# Allegro board Smartlocker10x8.brd
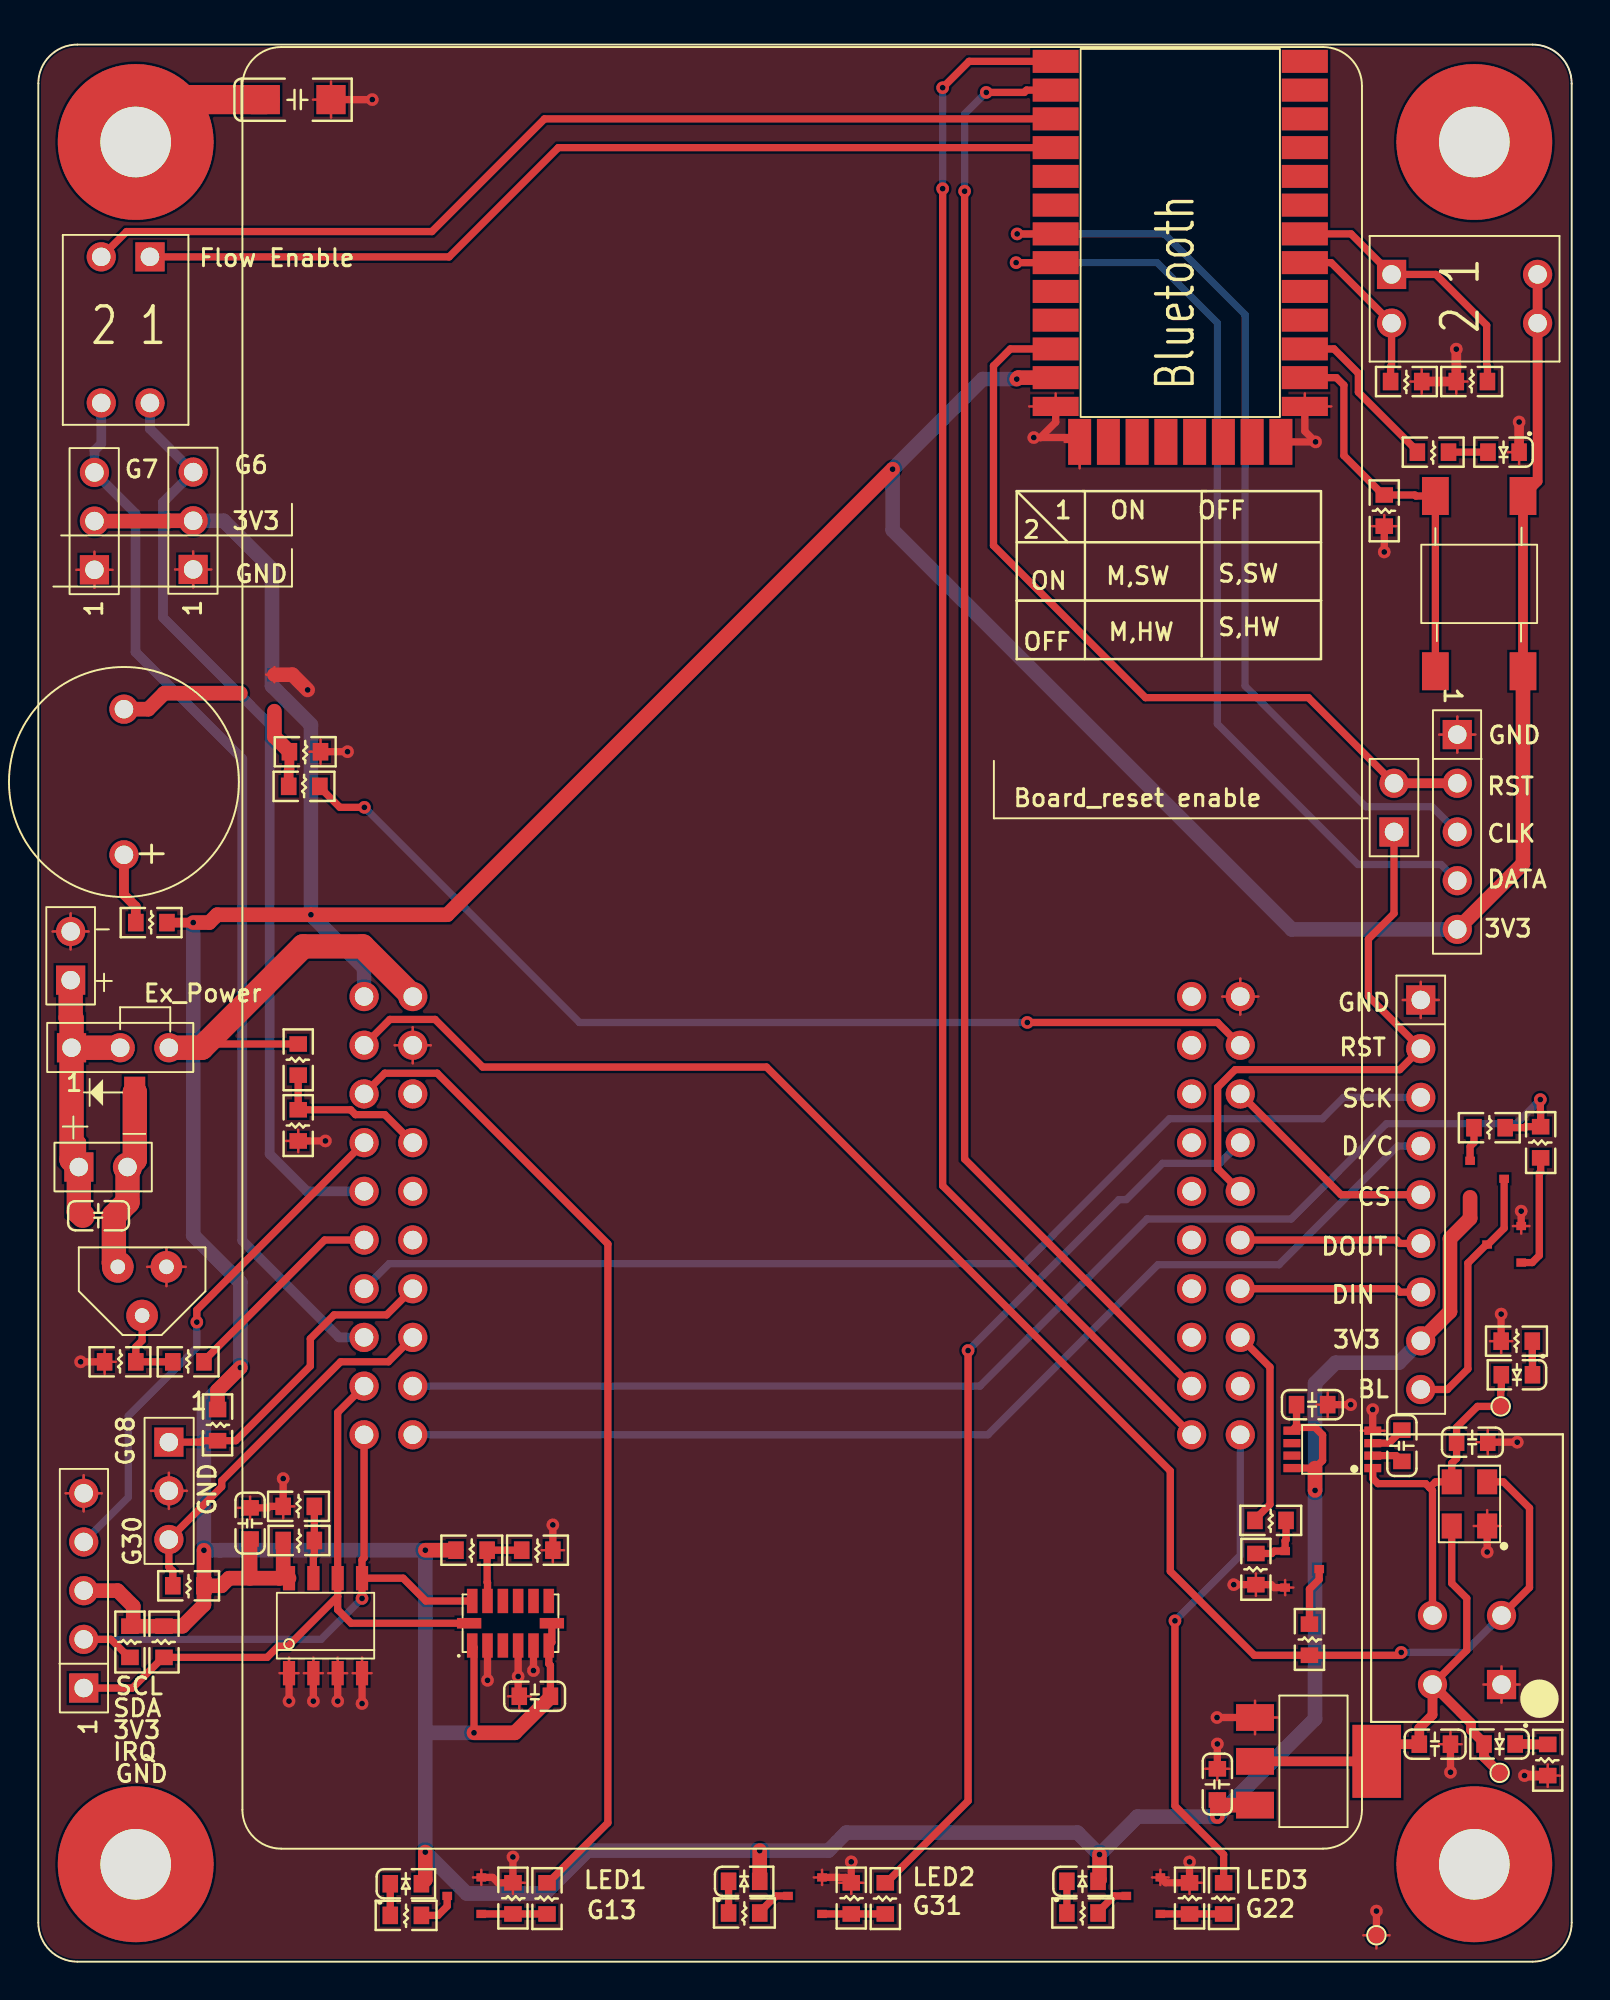
[diagram p0: board, top side]
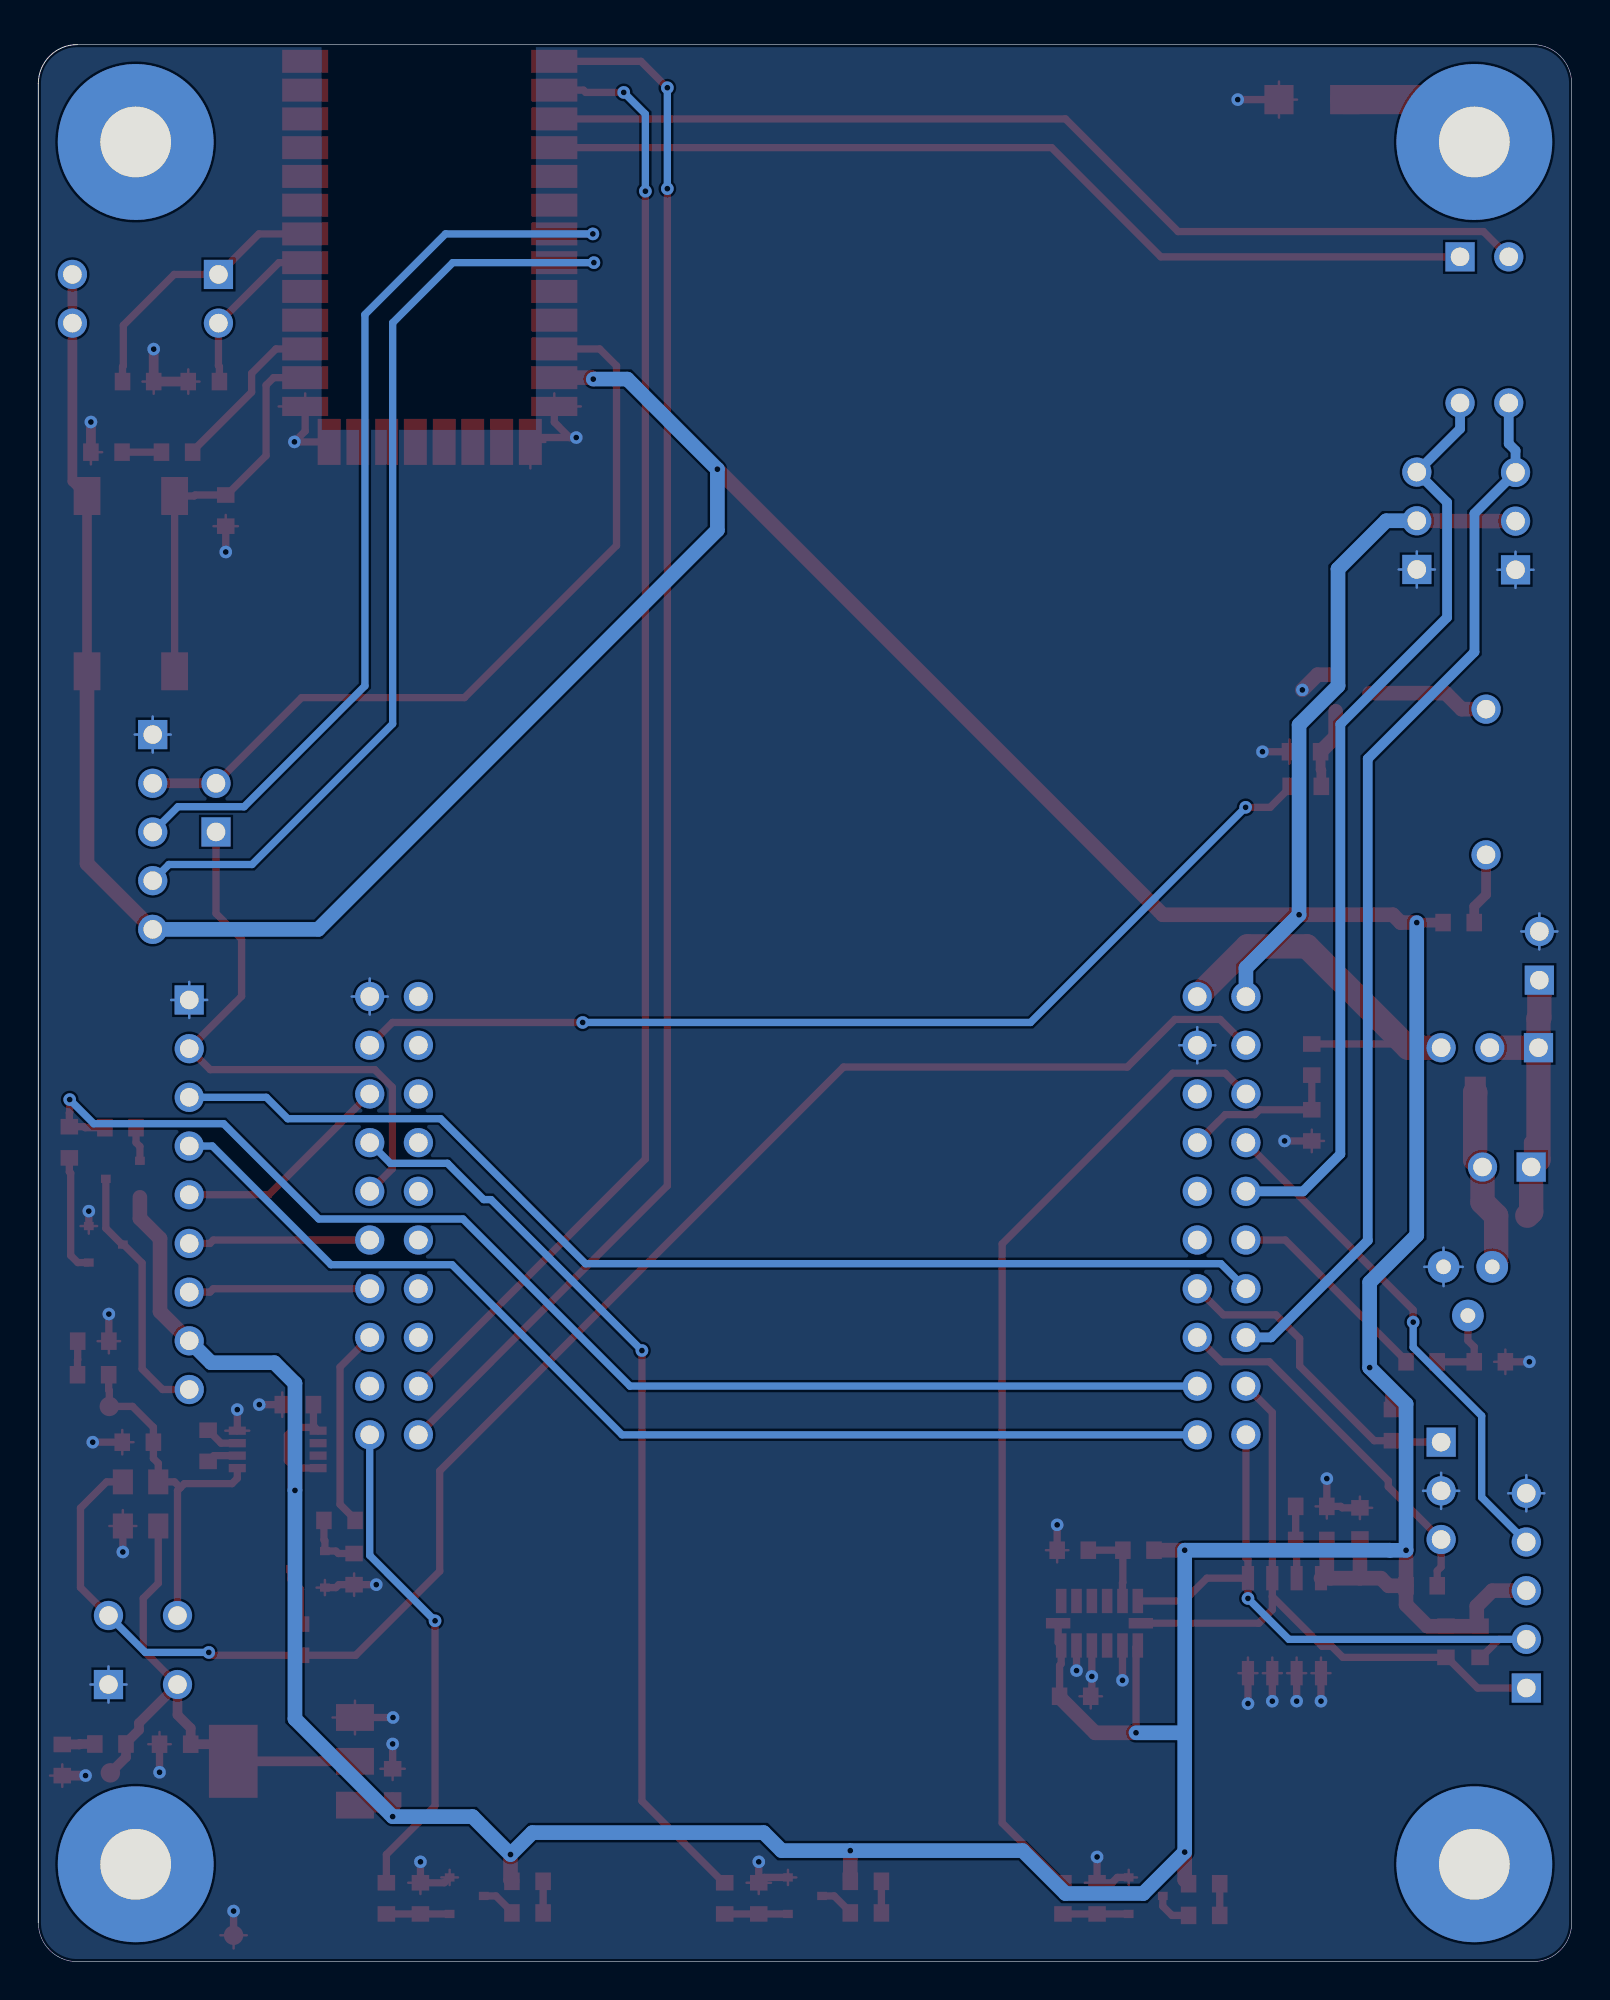
[diagram p1: board, bottom side, seen from below]

Outline 80.01 x 100 mm; copper layers: TOP, BOTTOM. Coordinates in mm from the lower left corner of the outline.
Outline path: 0,97.97 0,2.03 arc(0.6,0.6) 2.03,0 77.98,0 arc(79.41,0.6) 80.01,2.03 80.01,97.97 arc(79.41,99.4) 77.98,100 2.03,100 arc(0.6,99.4) 0,97.97

## Placement (name value [footprint] x y rotation side)
C1  0.1uF  [SMDC0603]  11.05 22.86 90 top
C2  0.1uF  [SMDC0603]  25.91 13.84 180 top
C3  1uF  [SMDC0603]  66.47 29.06 0 top
C4  10uF  [SMDC0603]  74.82 27.1 0 top
C5  0.1uF  [SMDC0603]  71.15 26.91 90 top
C6  1uF  [SMDC0603]  61.52 9.25 90 top
C7  10uF  [SMDC0603]  72.87 11.34 0 top
C8  1nF/2000V(NC)  [SMDC1206]  11.84 97.13 0 top
C9  0.1uF  [SMDC0603]  3.13 38.91 0 top
D1  1N4148  [1N4148_SOD80]  3.38 45.34 180 top
D2  LED  [SMDD0603]  54.48 4.19 180 top
D3  LED  [SMDD0603]  19.18 4.06 180 top
D4  LED  [SMDD0603]  36.83 4.19 180 top
D5  LED  [SMDD0603]  76.45 78.74 0 top
D6  LED  [SMDD0603]  77.15 30.61 0 top
D7  LED  [SMDD0603]  76.25 11.35 0 top
J1  connector  [HEADER5X1]  2.37 14.27 90 top
J2  connector  [HEADER2]  1.69 52.47 180 top
J3  connector  [HEADER3X1]  6.81 27.1 270 top
J4  connector  [HEADER3X1]  1.73 47.67 0 top
J5  connector  [HEADER2]  3.38 41.45 90 top
J12  connector  [HEADER3X1]  2.93 72.6 90 top
J13  connector  [HEADER3X1]  8.08 72.62 90 top
J14  connector  [HEADER5X1]  74.04 64.01 270 top
J15  connector  [HEADER2]  70.74 60.2 180 top
J16  fixhole  [HOLE145_320]  5.08 5.08 0 top
J17  fixhole  [HOLE145_320]  74.93 5.08 0 top
J18  fixhole  [HOLE145_320]  74.93 94.92 0 top
J19  fixhole  [HOLE145_320]  5.08 94.92 0 top
LS1  buzzer  [BUZZER]  4.47 61.53 90 top
P1  LCD  [HEADER9X1]  72.14 50.16 270 top
Q1  AO3401  [SOT23]  75.6 40.84 0 top
Q2  AO3400  [SOT23]  76.49 37.41 180 top
Q3  AO3400  [SOT23]  11.43 66.17 180 top
Q4  AO3400  [SOT23]  65.95 20.48 0 top
Q5  AO3400  [SOT23]  57.66 3.43 180 top
Q6  AO3400  [SOT23]  22.23 3.43 180 top
Q7  AO3400  [SOT23]  40.01 3.43 180 top
R1  5.1K(NC)  [SMDR0603]  4.78 16.69 270 top
R2  5.1K(NC)  [SMDR0603]  6.56 16.69 270 top
R3  10K  [SMDR0603]  7.83 19.61 0 top
R4  10K  [SMDR0603]  9.35 27.99 90 top
R5  150R  [SMDR0603]  75.73 43.5 180 top
R6  150R  [SMDR0603]  78.39 42.74 270 top
R7  150R  [SMDR0603]  7.83 31.29 180 top
R8  10K  [SMDR0603]  4.27 31.29 180 top
R9  0R  [SMDR0603]  5.9 54.2 180 top
R10  150R  [SMDR0603]  13.88 61.31 180 top
R11  10K  [SMDR0603]  13.91 63.11 0 top
R12  22K  [SMDR0603]  66.33 16.79 90 top
R13  150R  [SMDR0603]  64.3 23.02 0 top
R14  10K  [SMDR0603]  63.53 20.48 270 top
R18  270R  [SMDR0603]  54.48 2.54 0 top
R19  270R  [SMDR0603]  19.18 2.41 0 top
R20  270R  [SMDR0603]  36.83 2.54 0 top
R21  150R  [SMDR0603]  61.85 3.3 270 top
R22  150R  [SMDR0603]  26.54 3.3 270 top
R23  150R  [SMDR0603]  44.2 3.3 270 top
R24  10K  [SMDR0603]  60.07 3.3 90 top
R25  10K  [SMDR0603]  24.77 3.3 90 top
R26  10K  [SMDR0603]  42.42 3.3 90 top
R27  10K  [SMDR0603]  74.8 82.42 180 top
R28  10K  [SMDR0603]  71.37 82.42 0 top
R29  330R  [SMDR0603]  72.77 78.74 0 top
R30  10K  [SMDR0603]  70.23 75.69 270 top
R31  4.7K(NC)  [SMDR0603]  13.59 21.97 0 top
R32  4.7K  [SMDR0603]  22.61 21.46 0 top
R33  4.7K  [SMDR0603]  13.59 23.75 180 top
R34  4.7K(NC)  [SMDR0603]  26.04 21.46 0 top
R35  270R  [SMDR0603]  77.14 32.37 180 top
R36  270R  [SMDR0603]  78.76 10.52 270 top
R37  10K  [SMDR0603]  13.56 47.06 270 top
R38  10K  [SMDR0603]  13.56 43.62 270 top
SW1  SW DIP-2  [SW]  70.61 88.01 0 top
SW2  SW DIP-2  [SW]  5.82 88.93 270 top
SW3  PUSHBUTTON SW  [RST_SW4]  77.47 76.45 180 top
TP1  testpoint  [TEST40]  69.82 1.38 0 top
TP2  testpoint  [TEST40]  76.31 28.96 0 top
TP3  testpoint  [TEST40]  76.25 9.85 0 top
U1  CC3200  [BASE]  17 50.34 0 top
U2  -  [S8050]  6.69 36.24 180 top
U3  TGS8100  [4_TGS8100_SM]  74.68 23.88 90 top
U4  TGS8100  [EM8100]  74.55 16.26 90 top
U5  BLE  [BT_MODULE]  53.09 79.38 0 top
U6  -  [ADXL345]  24.64 17.65 90 top
U7  AT24C02  [SOIC8]  14.99 17.53 90 top
U8  LT1962-3  [LT1962]  67.52 26.72 90 top
U9  SPX1117M3-L-1.8  [SOT-223]  63.49 10.45 270 top

## Library data of the parts
C1-C9 = CAP NP
D1 = DIODE_0
D2-D7 = LED_0
J1 J14 = connector5x1
J2 J5 J15 = connector2x1
J3 J4 J12 J13 = connector3x1
J16-J19 = fixhole
LS1 = buzzer
P1 = LCD_0
Q1 = AO3401_0
Q2-Q7 = AO3400
R1-R14 R18-R38 = R
SW1 SW2 = SW DIP-2: room: NAND_MA
SW3 = SW
TP1-TP3 = PAD_3
U1 = CC3200_Connector
U2 = L14C1/TO
U3 U4 = TGS8100
U5 = BT_module
U6 = ADXL345
U7 = AT24C02: User Part Number: ***; Tolerance: ***
U8 = LT1962
U9 = AMS1117_0

## Footprints (pads in the part's own frame, mm; a bottom-side part is the same pattern mirrored in y, then rotated)
1N4148_SOD80
  rect 1.1x1.651 smd: 1(-1.651,0) 2(1.651,0)
4_TGS8100_SM
  rect 1.3x1.049 smd: 1(-1.151,-0.925) 2(1.151,-0.925) 3(1.151,0.925) 4(-1.151,0.925)
ADXL345
  rect 1.27x0.551 smd: 1(-1.161,1.999) 2(-1.161,1.199) 3(-1.161,0.399) 4(-1.161,-0.399) 5(-1.161,-1.199) 6(-1.161,-1.999) 8(1.161,-1.999) 9(1.161,-1.199) 10(1.161,-0.399) 11(1.161,0.399) 12(1.161,1.199) 13(1.161,1.999)
  rect 0.551x1.27 smd: 7(0,-2.159) 14(0,2.159)
BASE
  round 1.524 hole 0.965: 1(0,0) 2(2.54,0) 3(0,-2.54) 4(2.54,-2.54) 5(0,-5.08) 6(2.54,-5.08) 7(0,-7.62) 8(2.54,-7.62) 9(0,-10.16) 10(2.54,-10.16) 11(0,-12.7) 12(2.54,-12.7) 13(0,-15.24) 14(2.54,-15.24) 15(0,-17.78) 16(2.54,-17.78) 17(0,-20.32) 18(2.54,-20.32) 19(0,-22.86) 20(2.54,-22.86) 21(43.18,0) 22(45.72,0) 23(43.18,-2.54) 24(45.72,-2.54) 25(43.18,-5.08) 26(45.72,-5.08) 27(43.18,-7.62) 28(45.72,-7.62) 29(43.18,-10.16) 30(45.72,-10.16) 31(43.18,-12.7) 32(45.72,-12.7) 33(43.18,-15.24) 34(45.72,-15.24) 35(43.18,-17.78) 36(45.72,-17.78) 37(43.18,-20.32) 38(45.72,-20.32) 39(43.18,-22.86) 40(45.72,-22.86)
BT_MODULE
  rect 2.4x1.199 smd: 1(0,19.751) 2(0,18.25) 3(0,16.749) 4(0,15.25) 5(0,13.749) 6(0,12.25) 7(0,10.749) 8(0,9.251) 9(0,7.75) 10(0,6.251) 11(0,4.75) 12(0,3.251) 23(13,3.251) 24(13,4.75) 25(13,6.251) 26(13,7.75) 27(13,9.251) 28(13,10.749) 29(13,12.25) 30(13,13.749) 31(13,15.25) 32(13,16.749) 33(13,18.25) 34(13,19.751)
  rect 2.4x1.001 smd: 13(0,1.75) 22(13,1.75)
  rect 1.199x2.4 smd: 14(1.25,-0.099) 15(2.751,-0.099) 16(4.249,-0.099) 17(5.751,-0.099) 18(7.249,-0.099) 19(8.75,-0.099) 20(10.249,-0.099) 21(11.75,-0.099)
BUZZER
  round 1.524 hole 0.965: 1(-3.8,0) 2(3.8,0)
EM8100
  rect 1.524x1.524 hole 0.965: 1(-1.801,-1.801)
  round 1.524 hole 0.965: 2(1.801,-1.801) 3(1.801,1.801) 4(-1.801,1.801)
HEADER2
  rect 1.524x1.524 hole 0.965: 1(0,1.27)
  round 1.524 hole 0.965: 2(0,-1.27)
HEADER3X1
  rect 1.524x1.524 hole 0.965: 1(0,0)
  round 1.524 hole 0.965: 2(2.54,0) 3(5.08,0)
HEADER5X1
  rect 1.524x1.524 hole 0.965: 1(0,0)
  round 1.524 hole 0.965: 2(2.54,0) 3(5.08,0) 4(7.62,0) 5(10.16,0)
HEADER9X1
  rect 1.524x1.524 hole 0.965: 1(0,0)
  round 1.524 hole 0.965: 2(2.54,0) 3(5.08,0) 4(7.62,0) 5(10.16,0) 6(12.7,0) 7(15.24,0) 8(17.78,0) 9(20.32,0)
HOLE145_320
  round 8.128 hole 3.683: 1(0,0)
LT1962
  rect 0.432x0.889 smd: 1(-0.975,-2.108) 2(-0.325,-2.108) 3(0.325,-2.108) 4(0.975,-2.108) 5(0.975,2.108) 6(0.325,2.108) 7(-0.325,2.108) 8(-0.975,2.108)
RST_SW4
  rect 1.397x1.981 smd: 1(0,9.144) 2(0,0) 3(4.572,0) 4(4.572,9.144)
S8050
  round 1.651 hole 0.762: 1(0,0) 2(1.27,2.54) 3(2.54,0)
SMDC0603
  rect 0.813x0.914 smd: 1(-0.813,0) 2(0.813,0)
SMDC1206
  rect 1.524x1.524 smd: 1(0,0) 2(3.429,0)
SMDD0603
  rect 0.813x0.914 smd: 1(-0.813,0) 2(0.813,0)
SMDR0603
  rect 0.813x0.914 smd: 1(-0.813,0) 2(0.813,0)
SOIC8
  rect 1.27x0.635 smd: 1(-2.477,1.905) 2(-2.477,0.635) 3(-2.477,-0.635) 4(-2.477,-1.905) 5(2.477,-1.905) 6(2.477,-0.635) 7(2.477,0.635) 8(2.477,1.905)
SOT23
  rect 0.508x0.432 smd: 1(-0.889,0.94) 2(-0.889,-0.965) 3(0.889,0)
SOT-223
  rect 1.397x1.981 smd: 1(-2.286,0) 2(0,0) 3(2.286,0)
  rect 3.81x2.54 smd: 4(0,6.35)
SW
  rect 1.524x1.524 hole 0.965: 1(0,0)
  round 1.524 hole 0.965: 2(0,-2.54) 3(7.62,-2.54) 4(7.62,0)
TEST40
  round 1.016 smd: 1(0,0)

## Nets
1V8: C7.1 D7.1(ANODE) TP3.1 U3.4(HEATER +) U4.4(HEATER +) U9.2(VOUT) U9.4(VO)
3V: C4.1 D6.1(ANODE) TP2.1 U3.3(SENSOR +) U4.3(SENSOR +) U8.1(OUT)
3V3: C1.1 C2.1 C3.1 C6.1 D2.1(ANODE) D3.1(ANODE) D4.1(ANODE) J1.3 J12.2 J13.2 J14.5 P1.8(VCC) Q1.2(S) R1.1 R2.1 R3.2 R4.2 R9.1 R31.1 R32.1 SW1.3(B2) SW1.4(B1) SW3.1 SW3.2 U1.1(3V3) U5.12(VCC) U6.1(VDD) U6.6(VS) U6.7(C\S\) U7.8(VCC) U8.5(S\H\D\N\) U8.8(IN) U9.3(VIN)
5V: J4.3 R37.1 U1.2(5V)
GND: C1.2 C2.2 C3.2 C4.2 C6.2 C7.2 C8.2 D5.2(CATHODE) J1.5 J2.2 J3.2 J12.1 J13.1 J14.1 P1.1(GND) Q2.2(S) Q3.2(S) Q4.2(S) Q5.2(S) Q6.2(S) Q7.2(S) R8.2 R11.2 R14.2 R24.2 R25.2 R26.2 R27.2 R28.2 R30.2 R33.2 R34.2 R35.2 R36.2 R38.2 TP1.1 U1.4(GND) U1.22(GND) U2.1(EMITTER) U3.1(HEATER -) U4.1(HEATER -) U5.13(GND1) U5.14(GND2) U5.21(GND3) U5.22(GND4) U6.2(GND1) U6.4(GND2) U6.5(GND3) U7.1(A0) U7.2(A1) U7.3(A2) U7.4(GND) U8.4(GND) U9.1(GND)
GND_EARTH: C8.1 J19.1
VIN: C9.1 D1.2(K) J2.1 J4.1 J4.2 J5.1
ADC1: R12.1 U1.3(ADC1) U3.2(SENSOR -) U4.2(SENSOR -)
BL: P1.9(BL) Q1.3(D) Q2.3(D)
BUZZER: R10.1 U1.24(BUZZER)
D/C: P1.4(D/C) U1.20(AUD_DIN)
DEBUG_CLK: J14.3 U5.7(DEBUG_CLK)
DEBUG_DATA: J14.4 U5.8(DEBUG_DATA)
I2C_SCL: J1.1 R2.2 U1.17(I2C_SCL) U6.14(SCL) U7.6(SCL)
I2C_SDA: J1.2 R1.2 U1.19(I2C_SDA) U6.13(SDA) U7.5(SDA)
KEY1_LED1: R22.1 U1.5(KEY1/LED1)
KEY2_LED2: R23.1 U1.28(KEY2/LED2)
KEY3_LED3: R21.1 U1.40(KEY3/LED3)
MOTOR: R7.1 U1.11(ADC2)
P00: U5.34(P0_0)
P01: U5.33(P0_1)
P02: U5.32(P0_2)
P03: U5.31(P0_3)
P04: U5.30(P0_4)
P05: U5.29(P0_5)
P06: R27.1 SW1.1(A1) U5.28(P0_6)
P07: R28.1 SW1.2(A2) U5.27(P0_7)
P10: U5.26(P1_0)
P11: U5.25(P1_1)
P12: R29.1 U5.24(P1_2)
P13: R30.1 SW3.3 SW3.4 U5.23(P1_3)
P20: U5.9(P2_0)
POSITION1: J3.1 R4.1 U1.14(AUD_SYNC)
POSITION2: J3.3 R3.1 U1.16(AUD_CLK)
PWM05: R5.1 R6.1 U1.18(PWM05/AUD_DOUT)
RESETB: J14.2 J15.2 U5.11(RESETB)
RST: J15.1 P1.2(RST) U1.30(RST_OUT)
SPI_CLK: P1.3(SCK) U1.13(SPI_CLK)
SPI_CS: P1.5(CS) U1.26(SPI_CS)
SPI_DIN: P1.7(SDO) U1.34(SPI_DIN)
SPI_DOUT: P1.6(SDI) U1.32(SPI_DOUT)
TGS8100_PWM: R13.1 U1.36(PWM02)
TOUCH_IRQ: J1.4 U1.7(TOUCH_IRQ)
UART1_CTS: J13.3 SW2.4(B1) U1.9(UART1_CTS)
UART1_RTS: J12.3 SW2.3(B2) U1.15(UART1_RTS)
UART1_RX: U1.39(UART1_RX) U5.1(UART_TX)
UART1_TX: U1.37(UART1_TX) U5.2(UART_RX)
N3340313: C5.1 U8.2(SENSE)
N3340320: C5.2 U8.3(BYP)
N3341700: Q4.1(G) R13.2 R14.1
N3344560: Q3.1(G) R10.2 R11.1
N3344728: LS1.1(+) R9.2
N3349998: SW2.1(A1) U5.4(UART_RTS)
N3350002: SW2.2(A2) U5.3(UART_CTS)
N3357359: R31.2 R33.1 U7.7(WP)
N3357881: R32.2 R34.1 U6.12(ATL_ADDR)
N3371966: Q2.1(G) R6.2
N3374034: Q6.1(G) R22.2 R25.1
N3374376: Q7.1(G) R23.2 R26.1
N3374488: Q5.1(G) R21.2 R24.1
N3374892: C9.2 D1.1(A) J5.2 U2.3(COLLECTOR)
N3375092: R7.2 R8.1 U2.2(BASE)
N3375641: R37.2 R38.1 U1.8(ADC3)
N3380783: Q1.1(G) R5.2
N3382631: LS1.2(-) Q3.3(D)
N33415491: Q4.3(D) R12.2
N33491751: D5.1(ANODE) R29.2
N33634750: D6.2(CATHODE) R35.1
N33635570: D7.2(CATHODE) R36.1
N33739760: D3.2(CATHODE) R19.1
N33739761: Q6.3(D) R19.2
N33743180: D4.2(CATHODE) R20.1
N33743181: Q7.3(D) R20.2
N33744460: D2.2(CATHODE) R18.1
N33744461: Q5.3(D) R18.2

Pads without a net: J16 1; J17 1; J18 1; U1 6 10 12 21 23 25 27 29 31 33 35 38; U5 5 6 10 15 16 17 18 19 20; U6 3 8 9 10 11; U8 6 7

## Via types
v1: diameter 0.66, hole 0.305, TOP to BOTTOM, 61 vias

## Routing (per net, layer and track width the routed paths; a pad name or vN(x,y) marks a point on that pad's centre or on a via; arc(x,y) is an arc through that point)
1V8: length 27.7
  TOP w0.381: U4.4 74.54,16.24 74.54,18.95 73.75,19.74 U3.4
  TOP w0.508: TP3.1 75.44,10.67 D7.1 75.44,11.4 74.76,12.08 74.76,12.45 U4.4 72.75,12.87 72.06,12.18 C7.1 70.73,11.34 U9.4 U9.2
3V: length 19.1
  TOP w0.381: 72.6,24.72 72.91,25.03 U3.3 73.75,26 74.01,26.25 C4.1 74.01,27.87 75.1,28.96 TP2.1 76.31,29.79 76.34,29.82 D6.1 ; 72.6,24.72 72.75,24.57 U4.3 ; 72.6,24.72 72.39,24.94 69.9,24.94 69.63,25.21 U8.1
3V3: length 371.4
  TOP w0.381: U8.8 66.62,25.75 67.01,26.14 67.01,27.47 66.62,27.87 65.59,27.87 ; 65.59,27.87 U8.5 ; 65.59,27.87 65.65,27.94 C3.1 ; v1(22.73,11.94) 22.73,16.4 U6.1 ; C2.1 26.72,15.45 26.64,15.54 U6.6 26.8,16.65 U6.7
  TOP w0.508: SW3.1 SW3.2 78.23,77.22 SW1.4 ; R9.1 v1(8.08,54.2)
  TOP w0.762: v1(10.54,30.99) 9.35,29.8 R4.2 ; U9.3 61.79,8.16 C6.1 v1(61.52,7.57) ; J1.3 4.14,19.35 4.95,18.54 4.95,17.67 R1.1 R2.1 7.52,17.5 8.64,18.62 R3.2 ; D4.1 v1(37.64,5.79) ; v1(44.58,77.85) 21.34,54.61 v1(14.22,54.61) 9.33,54.61 8.92,54.2 v1(8.08,54.2) ; 66.62,25.75 v1(66.62,24.58) ; D3.1 20.19,4.27 v1(20.19,5.71) ; v1(51.05,82.55) 51.13,82.63 U5.12 ; C1.1 11.05,20 ; 11.05,20 12.57,20 ; 11.05,20 9.95,20 9.56,19.61 R3.2 ; 12.57,20 12.78,20.21 R31.1 ; 12.57,20 13.08,20 ; Q1.2 74.71,38.77 73.66,37.72 73.66,33.91 P1.8 ; R3.2 v1(8.64,21.46) ; R32.1 v1(20.19,21.46) ; SW3.1 77.47,57.28 J14.5 ; D2.1 55.37,4.27 v1(55.37,5.59) ; J12.2 6.79,75.14 6.81,75.16 J13.2 ; v1(22.73,11.94) 24.87,11.94 26.72,13.79 C2.1
  BOTTOM w0.762: v1(8.08,54.2) 8.08,37.89 10.54,35.43 v1(10.54,30.99) 8.64,29.09 v1(8.64,21.46) 9.48,21.46 9.48,21.46 v1(20.19,21.46) 20.19,11.94 ; J13.2 9.67,75.16 12.19,72.64 12.19,66.55 14.22,64.52 v1(14.22,54.61) 17,51.84 U1.1 ; v1(51.05,82.55) 49.28,82.55 v1(44.58,77.85) 44.58,74.68 65.41,53.85 J14.5 ; 20.19,11.94 v1(20.19,5.71) 22.35,3.56 26.42,3.56 28.65,5.79 v1(37.64,5.79) 41.22,5.79 42.16,6.73 54.23,6.73 v1(55.37,5.59) 57.35,7.57 v1(61.52,7.57) 66.62,12.66 v1(66.62,24.58) 66.62,30.17 67.69,31.24 70.99,31.24 P1.8 ; 20.19,11.94 v1(22.73,11.94)
5V: length 21.7
  TOP w0.381: 7.89,47.67 8.09,47.87 R37.1
  TOP w1.27: U1.2 16.92,52.96 13.82,52.96 8.53,47.67 J4.3
GND: length 216.9
  TOP w0.127: 25.4,4.11 R25.2 24.77,3.53 ; R30.2 70.87,74.88 ; R30.2 70.23,75.47 ; R30.2 69.59,74.88 ; 15.12,15.05 U7.3 ; U7.3 16.12,15.05 ; U7.3 15.62,15.86 ; 12.32,67.13 12.32,67.53 ; 12.32,67.13 11.88,67.13 ; 12.32,67.13 12.32,66.74 ; 74.58,82.42 R27.2 73.99,81.79 ; J2.2 1.69,54.68 ; J2.2 0.74,53.74 ; J2.2 2.63,53.74 ; J2.2 1.69,52.8 ; C7.2 74.27,11.34 ; C7.2 73.1,11.34 ; C7.2 73.69,11.98 ; U2.1 7.69,36.24 ; U2.1 6.69,37.25 ; U2.1 5.68,36.24 ; U2.1 6.69,35.24 ; 13.85,15.05 U7.2 ; U7.2 14.35,15.86 ; U7.2 14.85,15.05 ; J3.2 7.75,24.56 ; J3.2 6.81,25.5 ; J3.2 6.81,23.62 ; J3.2 5.87,24.56 ; 40.46,4.39 Q7.2 ; Q7.2 40.89,4 ; Q7.2 40.89,4.79 ; C2.2 25.68,13.84 ; C2.2 24.51,13.84 ; C2.2 25.1,13.21 ; C2.2 25.1,14.48 ; J14.1 74.04,64.95 ; J14.1 74.98,64.01 ; J14.1 74.04,63.07 ; J14.1 73.1,64.01 ; 65.06,19.12 Q4.2 ; Q4.2 65.49,19.51 ; Q4.2 65.06,19.91 ; C3.2 67.28,29.69 ; C3.2 67.28,28.42 ; C3.2 66.69,29.06 ; P1.1 73.08,50.16 ; P1.1 72.14,51.11 ; P1.1 72.14,49.22 ; P1.1 71.19,50.16 ; U9.1 63.49,13.61 ; U9.1 64.66,12.74 ; U9.1 63.49,11.86 ; 51.7,81.13 U5.13 53.09,81.81 ; 2.93,71.66 J12.1 ; J12.1 1.99,72.6 ; J12.1 3.87,72.6 ; J12.1 2.93,73.55 ; Q6.2 23.11,4.79 ; Q6.2 23.11,4 ; Q6.2 22.68,4.39 ; 63.53,19.08 R14.2 63.53,20.25 ; 58.55,4 Q5.2 ; Q5.2 58.55,4.79 ; Q5.2 58.98,4.39 ; Q5.2 58.11,4.39 ; U1.22 62.72,51.29 ; U1.22 63.66,50.34 ; U1.22 61.78,50.34 ; U1.22 62.72,49.4 ; U7.4 17.39,15.05 ; U7.4 16.39,15.05 ; U7.4 16.89,15.86 ; 19.54,46.86 U1.4 ; U1.4 18.6,47.8 ; U1.4 20.48,47.8 ; U1.4 19.54,48.75 ; 12.78,23.11 R33.2 13.36,23.75 ; 11.05,23.09 C1.2 ; C1.2 10.41,23.67 ; C1.2 11.05,24.26 ; 8.08,71.68 J13.1 ; J13.1 7.14,72.62 ; J13.1 9.02,72.62 ; J13.1 8.08,73.56 ; R34.2 27.43,21.46 ; R34.2 26.85,20.83 ; R34.2 26.26,21.46 ; 60.71,4.11 R24.2 60.07,3.53 ; 76.68,78.74 D5.2 77.27,78.1 ; U4.1 76.35,15.4 ; U4.1 75.41,14.46 ; U4.1 77.29,14.46 ; U4.1 76.35,13.51 ; R35.2 76.92,32.37 ; R35.2 76.33,31.73 ; R35.2 75.74,32.37 ; C6.2 62.16,10.06 ; C6.2 61.52,9.47 ; C6.2 60.88,10.06 ; R26.2 43.06,4.11 ; R26.2 41.78,4.11 ; R26.2 42.42,3.53 ; 75.04,27.1 C4.2 ; C4.2 75.63,26.46 ; C4.2 75.63,27.73 ; 14.73,62.48 R11.2 ; R11.2 14.73,63.75 ; R11.2 14.14,63.11 ; R38.2 13.56,43.4 ; R38.2 12.92,42.81 ; R38.2 13.56,42.22 ; 77.38,37.98 Q2.2 ; Q2.2 77.81,38.37 ; Q2.2 76.94,38.37 ; R8.2 4.05,31.29 ; R8.2 3.46,30.65 ; R8.2 3.46,31.93 ; 53.56,79.28 U5.14 54.34,77.89 ; R28.2 72.19,83.06 ; R28.2 71.6,82.42 ; R28.2 72.19,81.79 ; C8.2 15.27,98.07 ; C8.2 15.27,96.19 ; C8.2 14.33,97.13 ; 70.25,27.7 U8.4 69,27.7 ; 12.58,15.05 13.08,15.05 ; 13.08,15.05 13.58,15.05 ; 13.08,15.05 13.08,15.86 ; 66.09,81.81 U5.22 67.47,81.13 ; R36.2 79.4,9.71 ; R36.2 78.76,10.29 ; R36.2 78.76,9.12 ; J1.5 3.31,24.43 ; J1.5 2.37,25.37 ; J1.5 2.37,23.49 ; J1.5 1.42,24.43 ; 69.82,0.69 TP1.1 ; TP1.1 70.51,1.38 ; TP1.1 69.13,1.38 ; U3.1 76.31,22.73 ; U3.1 75.6,23.56 ; U3.1 74.89,22.73
  TOP w0.381: U6.4 v1(25.04,14.88) 25.04,13.9 C2.2 ; U8.4 v1(69.63,28.8) ; Q2.2 v1(77.38,39.15) ; R8.2 v1(2.21,31.29) ; U7.3 v1(15.62,13.59) ; v1(24.77,5.46) R25.2 23.99,4.11 23.71,4.39 Q6.2 ; v1(60.07,5.21) R24.2 58.83,4.11 Q5.2 ; U7.4 v1(16.89,13.46) ; R34.2 v1(26.85,22.78) ; C6.2 v1(61.52,11.36) ; C8.2 v1(17.42,97.13) ; U3.1 v1(75.6,21.37) ; C3.2 v1(68.48,29.06) ; v1(62.38,19.66) R14.2 64.33,19.66 64.48,19.51 Q4.2 ; U5.22 66.09,79.84 v1(66.65,79.28) U5.21 ; U6.5 v1(25.84,15.18) ; R35.2 v1(76.33,33.78) ; Q7.2 42.14,4.39 R26.2 v1(42.42,5.21) ; 13.08,15.05 v1(13.08,13.59) ; R30.2 v1(70.23,73.53) ; C4.2 v1(77.17,27.1) ; v1(12.78,25.2) R33.2 12.05,23.75 11.97,23.67 C1.2 ; U7.2 v1(14.35,13.59) ; 52.28,79.5 54.11,79.5 U5.14 ; 52.28,79.5 v1(51.94,79.5) ; 52.28,79.5 53.09,80.3 U5.13 ; C7.2 v1(73.69,9.88) ; U6.2 v1(23.44,14.68) ; U9.1 v1(61.5,12.74) ; R11.2 v1(16.13,63.11) ; TP1.1 v1(69.82,2.64) ; R38.2 v1(14.98,42.81)
  TOP w0.508: D5.2 v1(77.27,80.31) ; R28.2 R27.2 v1(73.99,84.11) ; R36.2 v1(77.55,9.71)
  TOP w0.762: v1(14.05,66.34) 13.26,67.13 12.32,67.13
  BOTTOM w0.127: 1.42,24.43 J1.5 ; J1.5 2.37,25.37 ; J1.5 2.37,23.49 ; J1.5 3.31,24.43 ; U4.1 77.29,14.46 ; U4.1 76.35,13.51 ; U4.1 75.41,14.46 ; U4.1 76.35,15.4 ; 62.72,49.4 U1.22 ; U1.22 63.66,50.34 ; U1.22 61.78,50.34 ; U1.22 62.72,51.29 ; J13.1 8.08,73.56 ; J13.1 7.14,72.62 ; J13.1 9.02,72.62 ; J13.1 8.08,71.68 ; J12.1 2.93,73.55 ; J12.1 3.87,72.6 ; J12.1 2.93,71.66 ; J12.1 1.99,72.6 ; J14.1 74.98,64.01 ; J14.1 73.1,64.01 ; J14.1 74.04,63.07 ; J14.1 74.04,64.95 ; 19.54,46.86 U1.4 ; U1.4 19.54,48.75 ; U1.4 20.48,47.8 ; U1.4 18.6,47.8 ; U2.1 6.69,37.25 ; U2.1 6.69,35.24 ; U2.1 7.69,36.24 ; U2.1 5.68,36.24 ; P1.1 72.14,51.11 ; P1.1 73.08,50.16 ; P1.1 71.19,50.16 ; P1.1 72.14,49.22 ; J3.2 7.75,24.56 ; J3.2 6.81,25.5 ; J3.2 5.87,24.56 ; J3.2 6.81,23.62 ; J2.2 1.69,54.68 ; J2.2 0.74,53.74 ; J2.2 1.69,52.8 ; J2.2 2.63,53.74
GND_EARTH: length 7.7
  TOP w1.524: C8.1 7.29,97.13 J19.1
VIN: length 21.5
  TOP w0.762: J4.1 1.73,47.67 D1.2 1.73,43.11 2.11,42.72 J5.1
  TOP w1.27: J4.1 1.73,49.2 1.69,49.24 J2.1 ; J4.1 1.73,41.83 J5.1 2.11,39.11 C9.1 ; J4.1 J4.2
ADC1: length 86.6
  TOP w0.381: U1.3 18.34,49.15 20.7,49.15 23.19,46.66 38,46.66 59.07,25.6 59.07,20.37 63.45,15.98 R12.1 70.97,15.98 v1(71.11,16.13) ; U3.2 76.45,25.03 77.81,23.66 77.81,19.52 U4.2
  BOTTOM w0.381: U4.2 74.42,16.13 v1(71.11,16.13)
BL: length 13.6
  TOP w0.381: P1.9 73.52,29.84 74.59,30.92 74.59,36.44 75.56,37.41 Q2.3 75.64,37.41 76.49,38.26 Q1.3
BUZZER: length 53.7
  TOP w0.381: R10.1 14.69,61.26 15.73,60.21 v1(17.01,60.21) ; v1(51.61,48.99) 61.53,48.99 U1.24
  BOTTOM w0.381: v1(17.01,60.21) 28.23,48.99 v1(51.61,48.99)
D/C: length 58.8
  BOTTOM w0.381: U1.20 49.55,27.48 58.42,36.36 64.74,36.36 70.93,42.55 P1.4
DEBUG_CLK: length 49.2
  TOP w0.381: U5.7 v1(51.07,90.12)
  BOTTOM w0.381: v1(51.07,90.12) 58.76,90.12 62.97,85.92 62.97,66.55 69.27,60.24 72.73,60.24 J14.3
DEBUG_DATA: length 50.7
  TOP w0.381: U5.8 v1(51.02,88.63)
  BOTTOM w0.381: J14.4 73.2,57.23 68.86,57.23 61.52,64.57 61.52,85.49 58.38,88.63 v1(51.02,88.63)
I2C_SCL: length 34.6
  TOP w0.381: 15.62,19.05 U7.6 15.62,28.65 U1.17 ; 15.62,19.05 15.62,18.36 16.32,17.65 U6.14 ; 15.62,19.05 13.03,16.45 12.52,16.45 11.94,15.87 R2.2 6.51,15.87 4.91,14.27 J1.1
I2C_SDA: length 33
  TOP w0.381: J1.2 3.79,16.81 4.73,15.87 R1.2 ; U1.19 17,21.06 16.89,20.96 U7.5 ; U7.5 19.03,20 20.22,18.81 U6.13 ; U7.5 v1(16.89,18.95)
  BOTTOM w0.381: v1(16.89,18.95) 14.75,16.81 J1.2
KEY1_LED1: length 51.5
  TOP w0.381: R22.1 26.59,4.11 29.72,7.24 29.72,37.44 20.82,46.34 18.08,46.34 U1.5
KEY2_LED2: length 48.3
  TOP w0.381: v1(48.51,31.88) 48.51,8.38 44.25,4.11 R23.1
  BOTTOM w0.381: U1.28 61.64,41.64 58.66,41.64 56.77,39.75 56.39,39.75 v1(48.51,31.88)
KEY3_LED3: length 25.8
  TOP w0.381: R21.1 61.85,5.59 59.31,8.13 v1(59.31,17.78)
  BOTTOM w0.381: U1.40 62.72,21.19 v1(59.31,17.78)
MOTOR: length 11
  TOP w0.381: U1.11 14.94,37.64 8.64,31.34 R7.1
P06: length 14.4
  TOP w0.381: R27.1 75.62,83.2 75.58,83.24 75.58,85.36 72.92,88.01 SW1.1 68.5,90.12 U5.28
P07: length 8.9
  TOP w0.381: R28.1 70.56,83.2 70.61,83.25 70.61,85.47 67.46,88.63 U5.27
P12: length 8.7
  TOP w0.381: R29.1 71.96,78.79 68.88,81.87 68.88,82.85 67.61,84.12 U5.24
P13: length 20.7
  TOP w0.381: SW3.4 SW3.3 71.88,76.45 71.83,76.5 R30.1 70.18,76.5 68.13,78.56 68.13,82.23 67.73,82.63 U5.23
POSITION1: length 16.9
  TOP w0.381: J3.1 8.5,27.1 8.58,27.18 R4.1 10.3,27.18 14.19,31.07 14.19,32.5 15.44,33.74 18.17,33.74 U1.14
POSITION2: length 19.8
  TOP w0.381: U1.16 18.27,31.29 15.78,31.29 9.57,25.09 9.57,24.78 J3.3 6.81,20.59 7.02,20.38 R3.1
PWM05: length 68.3
  TOP w0.381: R5.1 77.56,43.5 77.61,43.55 R6.1 78.39,44.28 78.37,44.3 v1(78.37,44.97)
  BOTTOM w0.381: v1(78.37,44.97) 77.11,43.71 70.34,43.71 65.37,38.74 57.85,38.74 49.14,30.02 U1.18
RESETB: length 42.3
  TOP w0.381: U5.11 50.72,84.12 49.84,83.24 49.84,73.87 57.77,65.94 66.27,65.94 J15.2
  TOP w0.508: J15.2 J14.2
RST: length 30.3
  TOP w0.381: U1.30 61.54,41.36 61.54,45.61 62.46,46.53 71.04,46.53 P1.2 69.4,50.36 69.4,53.34 70.74,54.68 J15.1
SPI_CLK: length 59.3
  BOTTOM w0.381: U1.13 18.3,36.41 51.46,36.41 59.02,43.97 67,43.97 68.11,45.09 P1.3
SPI_CS: length 11.6
  TOP w0.381: P1.5 67.98,40.01 U1.26
SPI_DIN: length 9.5
  TOP w0.381: P1.7 71.05,34.92 70.88,35.1 U1.34
SPI_DOUT: length 9.5
  TOP w0.381: P1.6 71.05,37.47 70.88,37.64 U1.32
TGS8100_PWM: length 10.5
  TOP w0.381: U1.36 64.27,31.01 64.27,23.85 63.48,23.07 R13.1
TOUCH_IRQ: length 26.9
  TOP w0.381: U1.7 8.27,34 v1(8.27,33.36)
  BOTTOM w0.381: J1.4 4.7,24.22 4.7,28.47 8.27,32.04 v1(8.27,33.36)
UART1_CTS: length 48.8
  BOTTOM w0.508: U1.9 14.02,40.18 12.07,42.13 12.07,64.55 6.5,70.12 6.5,76.12 J13.3 5.82,79.96 SW2.4
UART1_RTS: length 55.5
  BOTTOM w0.508: SW2.3 3.28,79.18 2.93,78.83 J12.3 5.07,75.54 5.07,68.31 10.64,62.75 10.64,37.61 15.69,32.56 U1.15
UART1_RX: length 82.1
  TOP w0.381: v1(47.19,92.48) 47.19,40.47 U1.39 ; U5.1 48.56,99.13 v1(47.19,97.75)
  BOTTOM w0.381: v1(47.19,97.75) v1(47.19,92.48)
UART1_TX: length 76.5
  TOP w0.381: U5.2 51.56,97.62 51.45,97.51 v1(49.46,97.51) ; U1.37 48.33,41.87 v1(48.33,92.35)
  BOTTOM w0.381: v1(49.46,97.51) 48.33,96.38 v1(48.33,92.35)
N3340313: length 1.6
  TOP w0.381: C5.1 70.85,26.4 U8.2
N3340320: length 1.8
  TOP w0.381: U8.3 70.47,27.05 C5.2
N3341700: length 3.2
  TOP w0.381: R13.2 65.11,22 65.06,21.95 Q4.1 64.48,21.42 64.36,21.29 R14.1
N3344560: length 4.3
  TOP w0.508: R10.2 13.06,62.15 13.1,62.18 R11.1
  TOP w0.762: 12.32,65.23 12.32,63.9 R11.1
N3344728: length 3.8
  TOP w0.508: LS1.1 4.47,55.66 5.09,55.04 R9.2
N3349998: length 49.6
  TOP w0.381: U5.4 27.13,94.63 21.44,88.93 SW2.1
N3350002: length 52.8
  TOP w0.381: U5.3 26.41,96.12 20.54,90.25 4.6,90.25 SW2.2
N3357359: length 3.8
  TOP w0.381: R33.1 R31.2 14.4,21.19 14.35,21.14 U7.7
N3357881: length 4.5
  TOP w0.381: R34.1 R32.2 23.42,19.79 23.44,19.77 U6.12
N3371966: length 6.2
  TOP w0.381: R6.2 78.39,41.2 78.32,41.13 78.32,36.84 77.95,36.47 Q2.1
N3374034: length 3.4
  TOP w0.381: R22.2 R25.1 Q6.1
N3374376: length 3.3
  TOP w0.381: Q7.1 R26.1 R23.2
N3374488: length 3.3
  TOP w0.381: Q5.1 R24.1 R21.2
N3374892: length 9.6
  TOP w1.27: U2.3 3.94,36.45 C9.2 4.65,39.62 J5.2 5.03,41.83 5.03,45.34 D1.1
N3375092: length 4.5
  TOP w0.381: U2.2 5.42,32.4 5.09,32.07 R8.1 R7.2
N3375641: length 8.5
  TOP w0.381: R37.2 R38.1 16.29,44.44 16.55,44.18 18.08,44.18 U1.8
N3380783: length 1.8
  TOP w0.381: R5.2 74.91,42.73 74.71,42.52 Q1.1
N3382631: length 6.4
  TOP w0.762: LS1.2 5.74,65.33 6.57,66.17 Q3.3
N33415491: length 3.1
  TOP w0.381: Q4.3 66.84,19.94 66.33,19.43 R12.2
N33491751: length 2.1
  TOP w0.381: R29.2 D5.1
N33634750: length 1.8
  TOP w0.381: R35.1 77.96,31.4 77.97,31.39 D6.2
N33635570: length 1.7
  TOP w0.508: R36.1 77.87,11.33 77.85,11.35 D7.2
N33739760: length 1.7
  TOP w0.381: D3.2 R19.1
N33739761: length 2.1
  TOP w0.381: Q6.3 21.34,2.89 20.86,2.41 R19.2
N33743180: length 1.7
  TOP w0.381: D4.2 R20.1
N33743181: length 1.9
  TOP w0.381: Q7.3 38.48,3.43 37.64,2.59 R20.2
N33744460: length 1.7
  TOP w0.381: D2.2 R18.1
N33744461: length 1.9
  TOP w0.381: Q5.3 56.13,3.43 55.3,2.59 R18.2

## Copper pours and planes (outline as drawn; the poured copper is in the pictures)
GND on TOP: 2.03,0.14 0.69,0.69 0.14,2.03 0.14,97.97 0.69,99.31 2.03,99.86 77.98,99.86 79.32,99.31 79.87,97.97 79.87,2.03 79.32,0.69 77.98,0.14 ; 2 cut-outs
GND on BOTTOM: 2.03,0.14 0.69,0.69 0.14,2.03 0.14,97.97 0.69,99.31 2.03,99.86 77.98,99.86 79.32,99.31 79.87,97.97 79.87,2.03 79.32,0.69 77.98,0.14 ; 3 cut-outs

## Text on the board
Ref Des/Silkscreen Top: SDA | 3V3 | IRQ | SCL | GND | G7 | Ex_Power | Flow Enable | G6 | LED1 | G13 | LED2 | G31 | Board_reset enable | 2 | OFF | ON | 1   ON    OFF | M,SW | M,HW | S,SW | S,HW | LED3 | G22 | DOUT | DIN | RST | D/C | SCK | CS | BL | CLK | DATA | G08 | G30
